# EAGLE board sensor_board_aprik_25 (EAGLE 6.6.0)
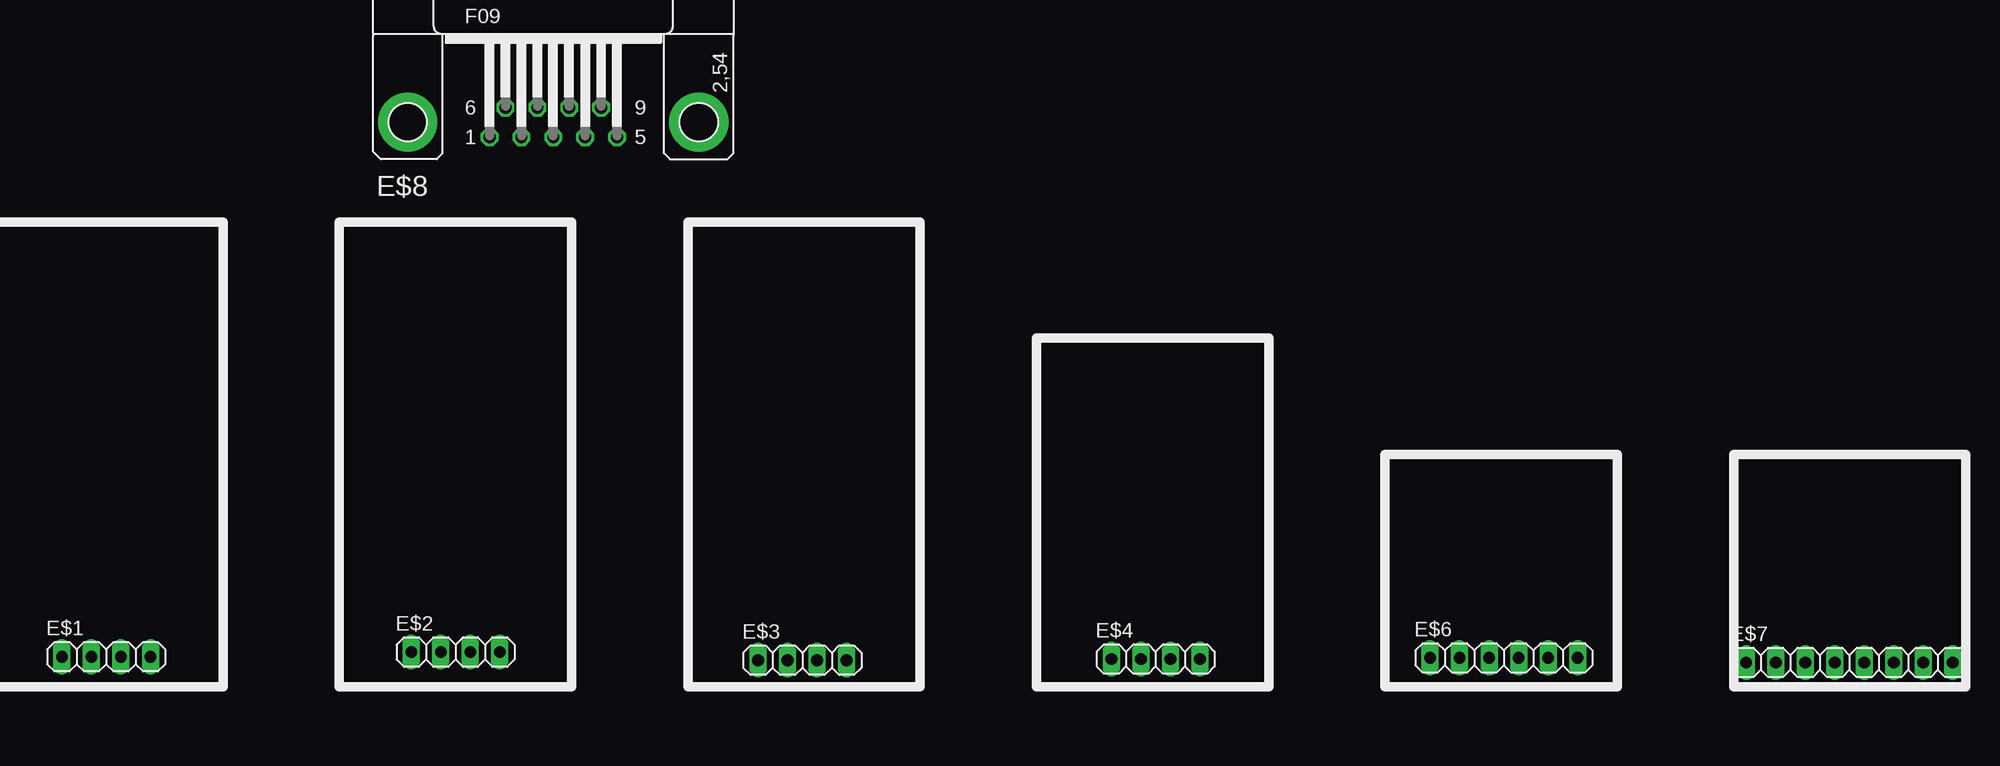
[diagram p0: board, top side]
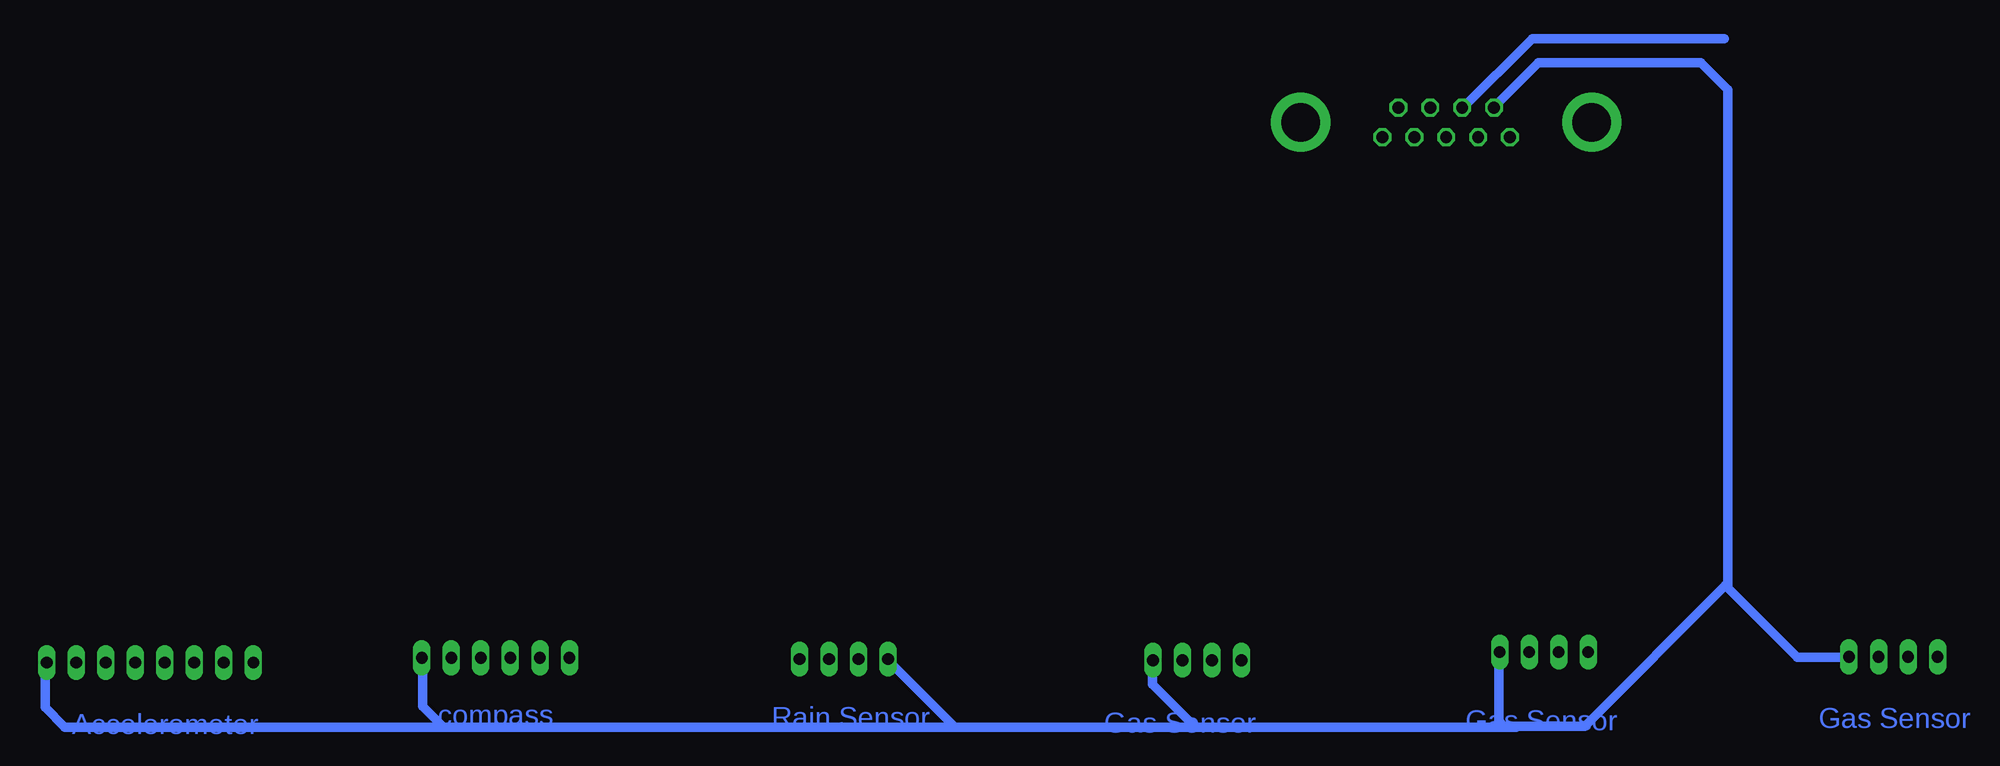
[diagram p1: board, bottom side, seen from below]

No outline drawn. Coordinates in mm, seen from the top.
Copper layers (1*16): Top 0.035mm / dielectric 1.5mm / Bottom 0.035mm
Design rules "default": minimum track width 10mil, minimum drill 24mil, track to track 8mil, track to pad 8mil, pad to pad 8mil, via to via 8mil, smd to smd 8mil, copper to edge 40mil, drill to drill 8mil, minimum pad ring 10mil, minimum via ring 8mil, stop-mask expansion 4mil, vias tented up to drill 0mil, thermal gap 10mil

## Footprints (pad centres in the part's own frame; a part is rotated, then mirrored left to right if it is on the bottom)
1X04 = drill 1.016 long: 1 -3.81,0; 2 -1.27,0; 3 1.27,0; 4 3.81,0
1X06 = drill 1.016 long: 1 -6.35,0; 2 -3.81,0; 3 -1.27,0; 4 1.27,0; 5 3.81,0; 6 6.35,0
1X08 = drill 1.016 long: 1 -8.89,0; 2 -6.35,0; 3 -3.81,0; 4 -1.27,0; 5 1.27,0; 6 3.81,0; 7 6.35,0; 8 8.89,0
F09HP = drill 1.016 octagon: 1 -5.486,-1.27; 2 -2.743,-1.27; 3 0,-1.27; 4 2.743,-1.27; 5 5.486,-1.27; 6 -4.115,1.27; 7 -1.372,1.27; 8 1.372,1.27; 9 4.115,1.27 | drill 3.302 pad 5.08: G1 -12.522,0; G2 12.522,0

## Placement (x,y rotation side)
E$1  [1X04]  19.94,22.57 0 top
E$2  [1X04]  50.01,22.97 0 top
E$3  [1X04]  79.85,22.27 0 top
E$4  [1X04]  110.26,22.37 0 top
E$6  [1X06]  140.23,22.47 0 top
E$7  [1X08]  169.97,22.07 0 top
E$8  [F09HP]  58.42,68.58 0 top

## Library data of the parts
E$1-E$4 E$6 E$7 = pinhead
E$8 = con-subd

## Tracks (layer width: path | path; a pad name or v marks a point on that pad's centre or on a via)
S$1
  Bottom 0.813: 54.4,69.8 50.5,73.7 36.5,73.7 34.2,71.4 34.2,28.5 28.2,22.5 23.6,22.5
S$2
  Bottom 0.813: 34.4,28.7 46.5,16.6 53.5,16.6 53.9,17 53.9,23
S$3
  Bottom 0.813: 52.4,16.5 80,16.5 | 80,16.5 83.7,20.2 83.7,22.6 | 80,16.5 100.7,16.5 | 100.7,16.5 106.6,22.4 | 100.7,16.5 144.7,16.5 | 144.7,16.5 146.5,18.3 146.5,22.6 | 144.7,16.5 177.3,16.5 179,18.2 179,22.4 178.9,22.5
S$4
  Bottom 0.813: 57.1,69.7 51,75.8 34.5,75.8

## Text on the board
Bottom: Gas Sensor | Gas Sensor | Gas Sensor | compass | Rain Sensor | Accelerometer
tPlace: Pressure